# Altium PCB S905D_MIC_V1.0.PcbDoc
Units mil, origin at the board's own origin, x right, y up, seen from the top; angles counter-clockwise.
Board outline 2558.83 x 2558.83 mil, 2 copper layers (Top Layer, Bottom Layer); 57 components, 61 nets, 477 pads, 459 vias.
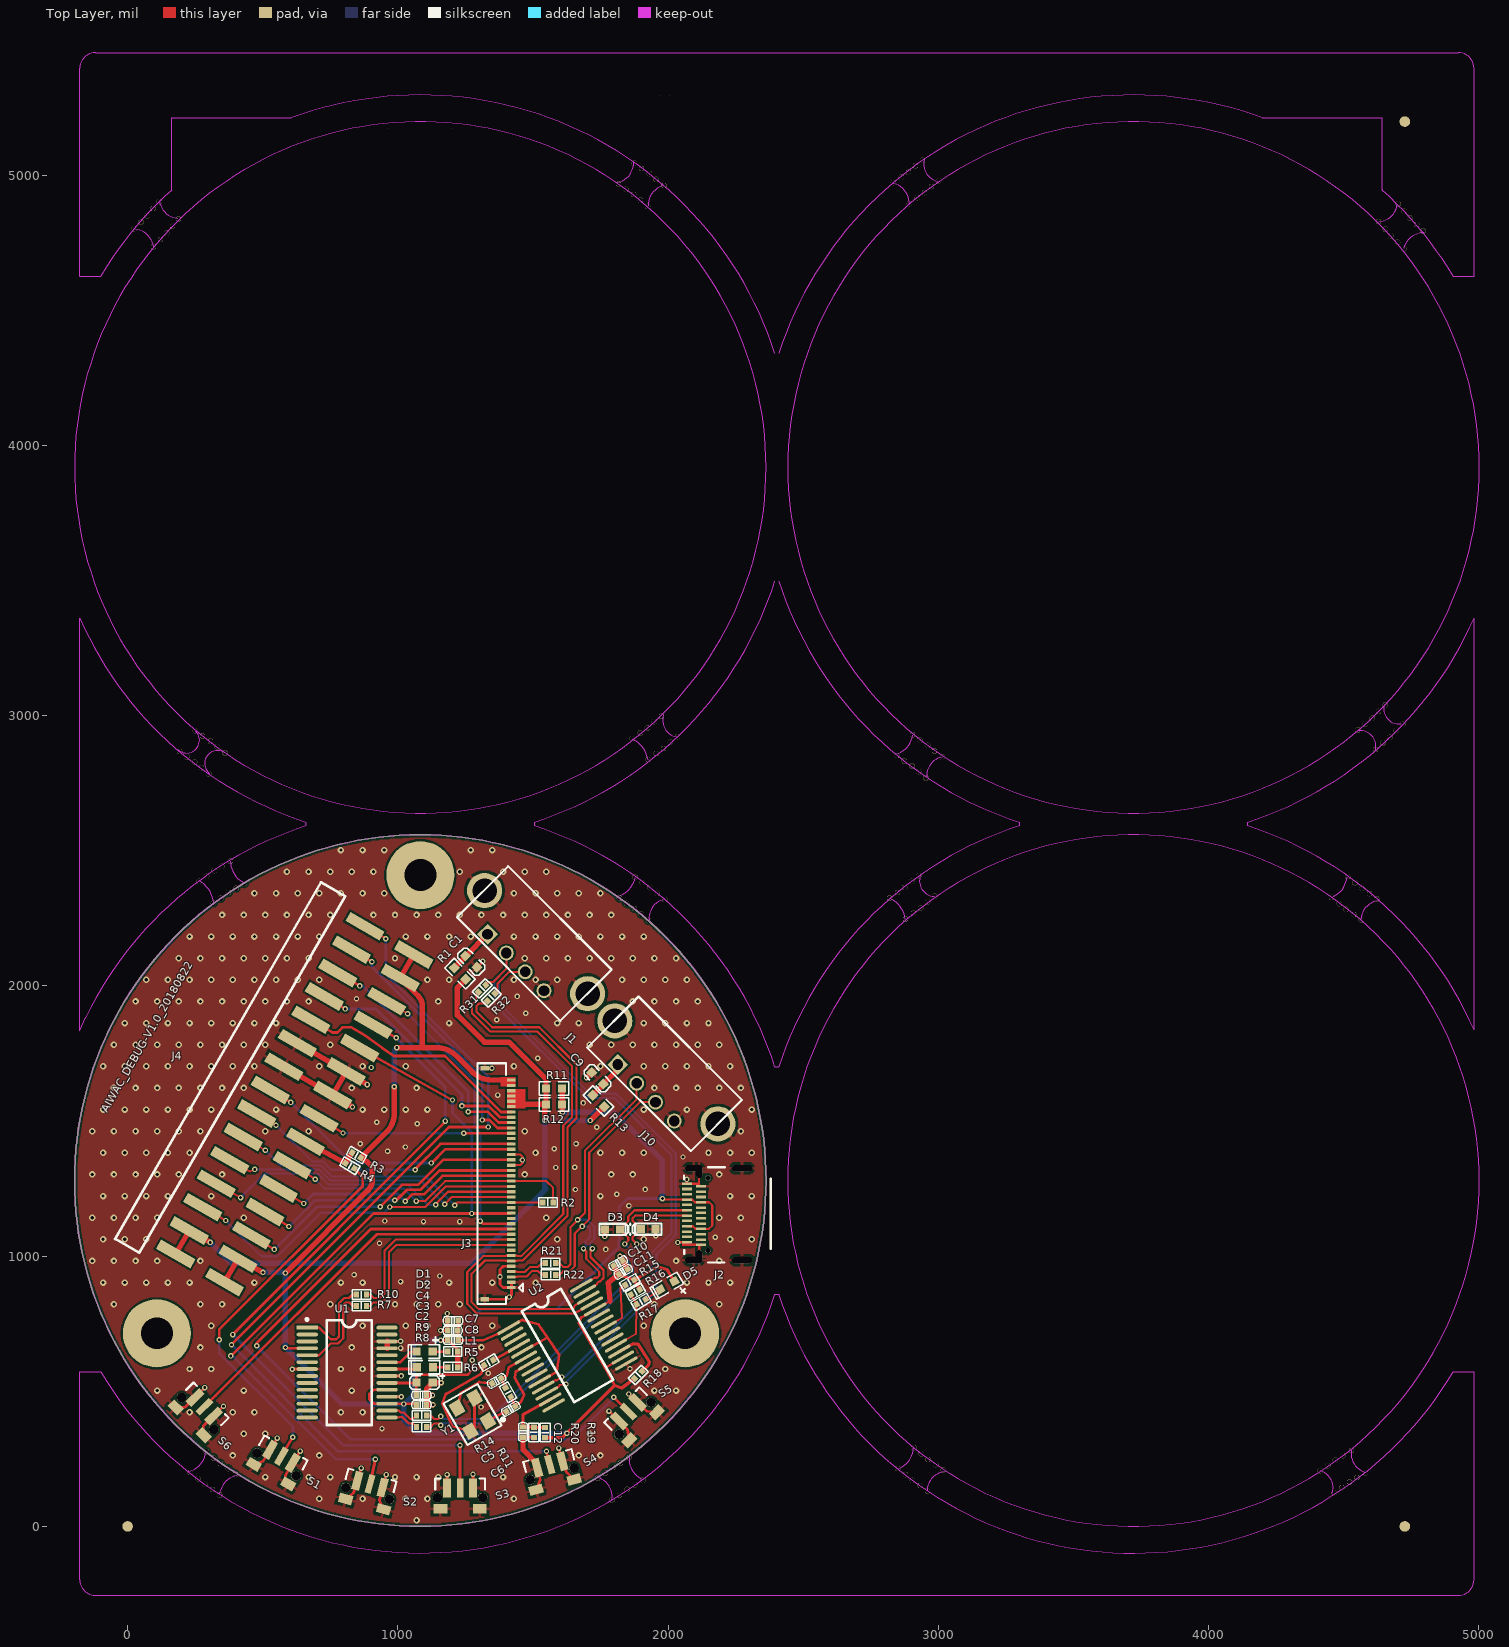
[diagram p0: Top Layer view]
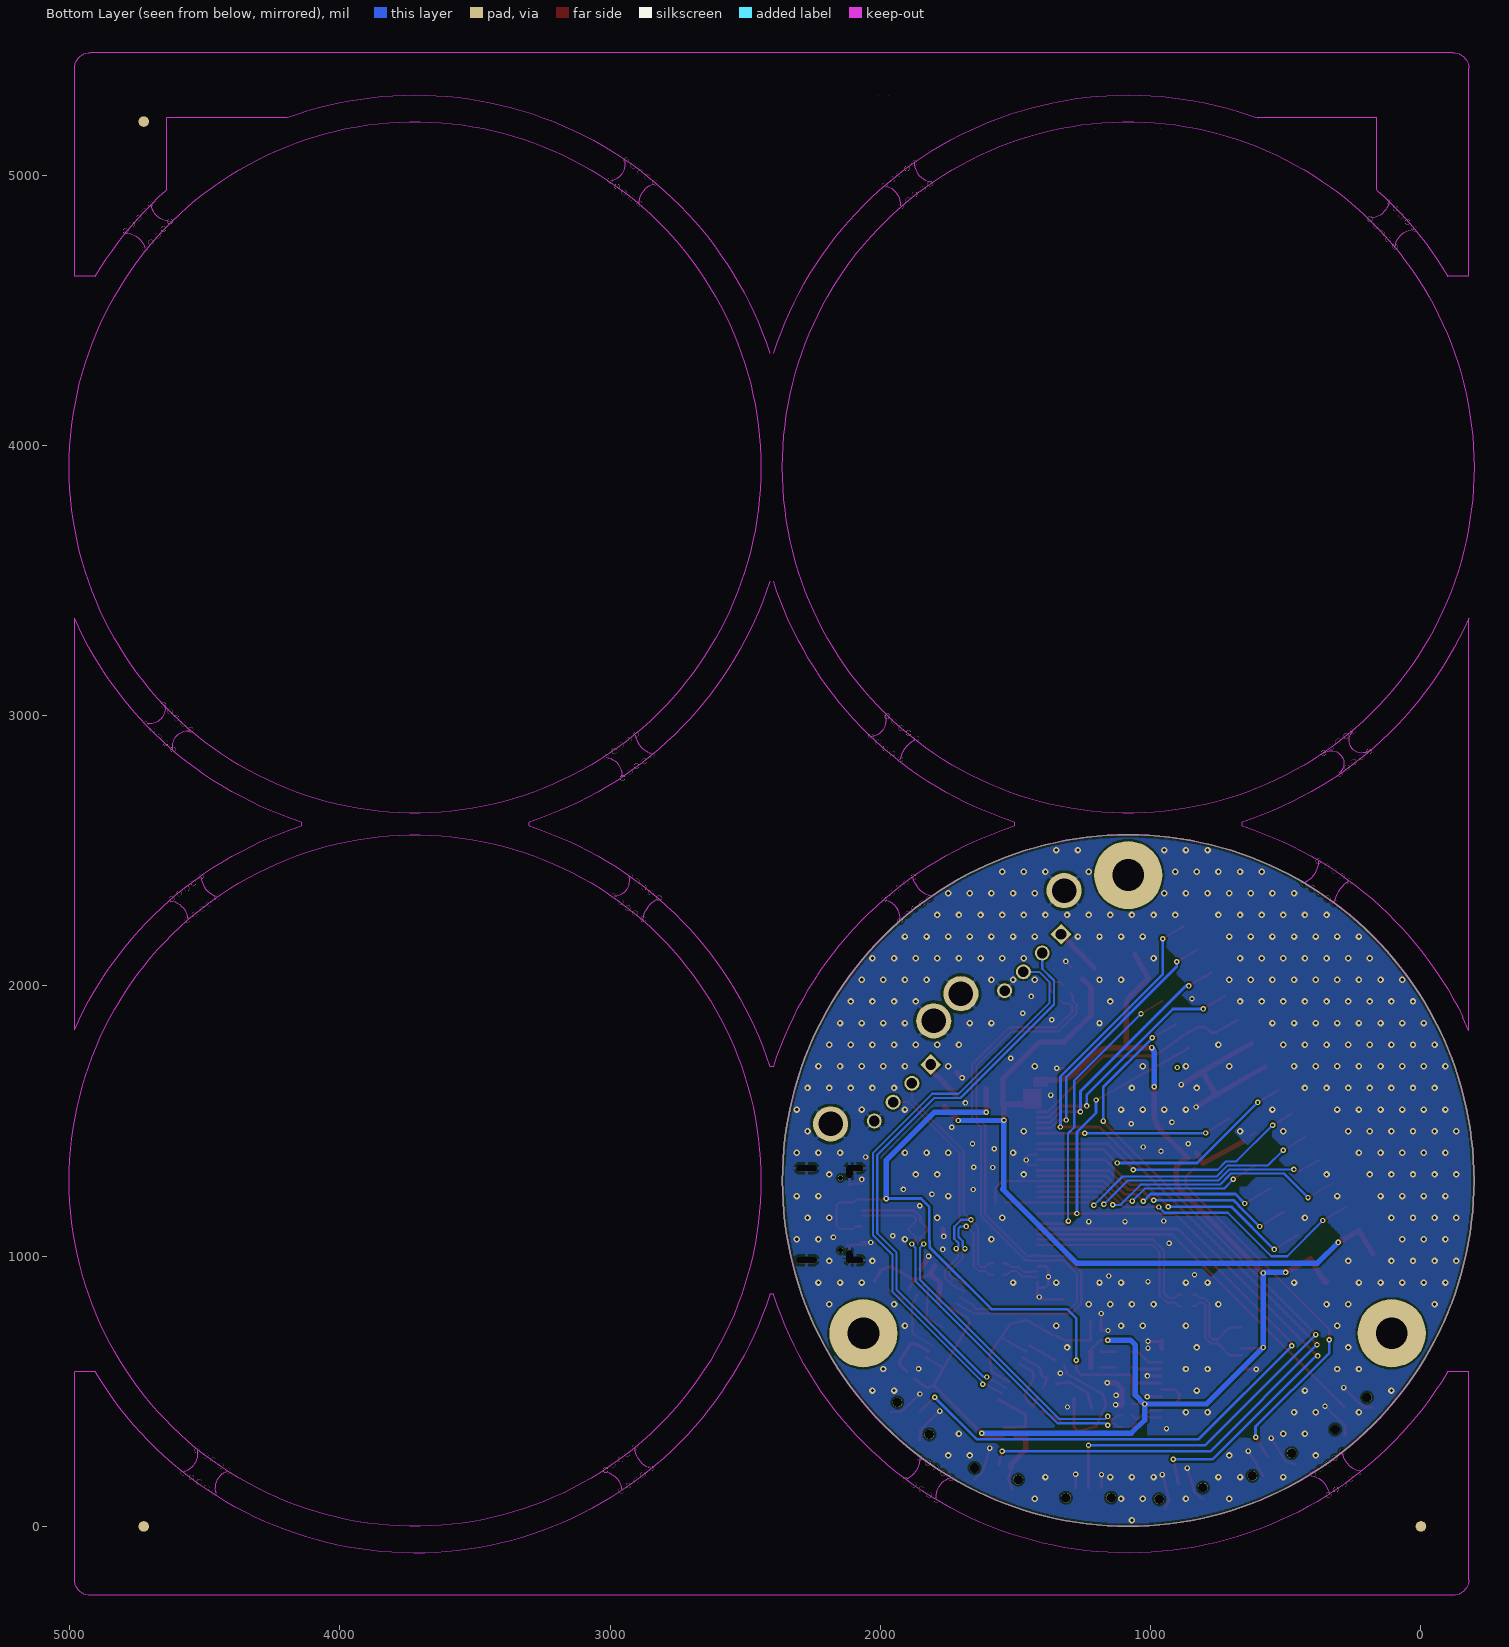
[diagram p1: Bottom Layer view, seen from below]

## Layer stack, top to bottom
Top Solder: solder mask 0.4, Solder Resist, Dk 3.5
Top Layer: signal copper 1.4
Dielectric 1: dielectric 12.6, FR-4, Dk 4.8
Bottom Layer: signal copper 1.4
Bottom Solder: solder mask 0.4, Solder Resist, Dk 3.5

## Board outline
-196.26,1279.66 ccw(c1083.16,1279.66) 1083.16,0.25 ccw(c1083.16,1279.66) 2362.57,1279.66 ccw(c1083.16,1279.66) 1083.16,2559.08 ccw(c1083.16,1279.66)

## Design rules (kind name [scope] priority, off if disabled: settings)
Clearance Clearance_1 [All] p1: gap=7
Clearance [All] p2: gap=7
DiffPairsRouting DiffPair_DiffPairsRouting_2 [InDifferentialPair ('NewDifferentialPair2')] p1: maxlimit=8 minlimit=8 mostfreqgap=8 toplayer_minwidth=8 toplayer_maxwidth=8 toplayer_prefwidth=8 bottomlayer_minwidth=8 bottomlayer_maxwidth=8 bottomlayer_prefwidth=8 maxuncoupledlength=500
DiffPairsRouting DiffPairsRouting_1 [All] p2: maxlimit=8 minlimit=8 mostfreqgap=8 toplayer_minwidth=8 toplayer_maxwidth=8 toplayer_prefwidth=8 bottomlayer_minwidth=8 bottomlayer_maxwidth=8 bottomlayer_prefwidth=8 maxuncoupledlength=500
DiffPairsRouting DiffPair_DiffPairsRouting_1 [InDifferentialPair ('NewDifferentialPair3')] p3: maxlimit=8 minlimit=8 mostfreqgap=8 toplayer_minwidth=8 toplayer_maxwidth=8 toplayer_prefwidth=8 bottomlayer_minwidth=8 bottomlayer_maxwidth=8 bottomlayer_prefwidth=8 maxuncoupledlength=500
DiffPairsRouting DiffPair_DiffPairsRouting [InDifferentialPair ('NewDifferentialPair4')] p4: maxlimit=8 minlimit=8 mostfreqgap=8 toplayer_minwidth=8 toplayer_maxwidth=8 toplayer_prefwidth=8 bottomlayer_minwidth=8 bottomlayer_maxwidth=8 bottomlayer_prefwidth=8 maxuncoupledlength=500
DiffPairsRouting [All] p5: maxlimit=10 minlimit=8 mostfreqgap=8 toplayer_minwidth=8 toplayer_maxwidth=8 toplayer_prefwidth=8 bottomlayer_minwidth=8 bottomlayer_maxwidth=8 bottomlayer_prefwidth=8 maxuncoupledlength=500
DiffPairsRouting DiffPair_DiffPairsRouting_3 [InDifferentialPair ('NewDifferentialPair1')] p6: maxlimit=8 minlimit=8 mostfreqgap=8 toplayer_minwidth=8 toplayer_maxwidth=8 toplayer_prefwidth=8 bottomlayer_minwidth=8 bottomlayer_maxwidth=8 bottomlayer_prefwidth=8 maxuncoupledlength=500
MatchedLengths DiffPair_MatchedLengths [InDifferentialPair ('NewDifferentialPair4')] p1: tolerance=1000 checknetsindiffpair=FALSE checkdiffpairvsdiffpair=TRUE checkxsignals=TRUE checkothers=TRUE
MatchedLengths DiffPair_MatchedLengths_1 [InDifferentialPair ('NewDifferentialPair3')] p2: tolerance=1000 checknetsindiffpair=FALSE checkdiffpairvsdiffpair=TRUE checkxsignals=TRUE checkothers=TRUE
MatchedLengths DiffPair_MatchedLengths_2 [InDifferentialPair ('NewDifferentialPair2')] p3: tolerance=1000 checknetsindiffpair=FALSE checkdiffpairvsdiffpair=TRUE checkxsignals=TRUE checkothers=TRUE
MatchedLengths DiffPair_MatchedLengths_3 [InDifferentialPair ('NewDifferentialPair1')] p4: tolerance=1000 checknetsindiffpair=FALSE checkdiffpairvsdiffpair=TRUE checkxsignals=TRUE checkothers=TRUE
PolygonConnect PolygonConnect_2 [isvia] p1: connectstyle=Direct reliefconductorwidth=10 reliefentries=4 polygonreliefangle="90 Angle" airgapwidth=10
PolygonConnect [All] p2: connectstyle=Relief reliefconductorwidth=10 reliefentries=4 polygonreliefangle="90 Angle" airgapwidth=10
RoomDefinition Sheet1 [InComponentClass('Sheet1')] p1: confinementstyle=ConfineIn formatcopy=TRUE lockcomponents=FALSE outline -6050.53,-3977.53 -4050.53,-3977.53 -4050.53,-2977.53 -6050.53,-2977.53
RoutingVias [All] p1: holewidth=10 width=20 viastyle="Through Hole" minholewidth=10 minwidth=20 maxholewidth=10 maxwidth=20
SilkToSilkClearance [All] p1: silktosilkclearance=0
SilkToSolderMaskClearance [IsPad] p1: minsilkscreentomaskgap=0 clearancetoexposedcopper=TRUE
SolderMaskExpansion [All] p1: expansion=4
Width [All] p1: maxlimit=20 minlimit=8 preferedwidth=10 minimp=50.000000 maximp=50.000000 favimp=50.000000
27 further rules are at their usual default settings.

## Components (designator, comment, footprint, x,y, rotation, side; value= is the part's Value field where it differs from the comment)
C1 "106K50V" C0603 1250,2111 r315 top
C2 "101J10V" C0402 1087.04,449.83 r0 top
C3 "101J10V" C0402 1087.04,485.83 r0 top
C4 "106K50V" C0603 1069.04,531.83 r0 top
C5 "22PF" C0402 1365.55,538.5 r30 top
C6 "22PF" C0402 1418,435 r30 top
C7 "0.1UF" C0402 1204,761 r180 top
C8 "0.1UF" C0402 1203,725 r180 top
C9 "106K50V" C0603 1760,1637 r135 top
C10 "0.1UF" C0402 1815,974 r210 top
C11 "0.1UF" C0402 1834,942 r210 top
C12 "0.1UF" C0402 1463,349 r270 top
D1 "LED0603G" D-LED0603G 1129.04,646.83 r180 top
D2 "LED0603G" D-LED0603G 1130.04,588.83 r180 top
D3 "ESDA_TR1/0603" HS_0603D 1794.5,1099 r180 top
D4 "ESDA_TR1/0603" HS_0603D 1926.5,1100 r0 top
D5 "LED0603G" D-LED0603G 2022.96,907 r210 top
J1 "USB" USB-A 1331.81,2191.19 r315 top
J2 "TYPEC-3KU024S" "MICRO -TYPE C" 2069.86,1046.93 r90 top locked
J3 "FH34SRJ-40S" FH34SRJ-40S 1371.04,1267.83 r90 top locked
J4 "CN15*2 贴片" "CN15*2 贴片" 878.04,2220.65 r240 top locked
J10 "USB" USB-A 1814,1709 r315 top
L1 "120R/0402" C0402 1204,689 r0 top
R1 "0R" R0603 1208.43,2066.57 r315 top
R2 "22R" R0402 1555.54,1198.83 r0 top
R3 "10K" R0402 847.04,1373.83 r330 top
R4 "22R  NC" R0402 822.58,1334.33 r150 top
R5 "330R" R0402 1203.04,646.83 r0 top
R6 "330R" R0402 1203.04,588.83 r0 top
R7 "22R" R0402 865,816 r180 top
R8 "2.2R" R0402 1088.04,367.83 r0 top
R9 "2.2R" R0402 1088.04,410.83 r0 top
R10 "22R" R0402 865,858 r180 top
R11 "0R  NC" R0603 1608.04,1620 r180 top
R11 "1M" R0402 1408,496 r120 top
R12 "0R NC" R0603 1548.04,1561.83 r0 top
R13 "0R" R0603 1721,1595 r315 top
R14 "1M" R0402 1336,606 r210 top
R15 "100K" R0402 1858,903 r210 top
R16 "100K" R0402 1879,867 r210 top
R17 "1K" R0402 1900,831 r210 top
R18 "10K" R0402 1889.44,560.44 r45 top
R19 "10K" R0402 1545,347 r270 top
R20 "47K" R0402 1503,348 r90 top
R21 "0R" R0402 1565,974 r0 top
R22 "0R" R0402 1565,931 r0 top
R31 "0R" R0402 1312,1990.47 r45 top
R32 "0R" R0402 1345.47,1958 r45 top
S1 "KSMD4.5X3-6P" SKRTLAE010 569.04,259.83 r330 top
S2 "KSMD4.5X3-6P" SKRTLAE010 897.02,156.4 r345 top
S3 "KSMD4.5X3-6P" SKRTLAE010 1230.27,141.83 r0 top
S4 "KSMD4.5X3-6P" SKRTLAE010 1562.04,228.83 r15 top
S5 "KSMD4.5X3-6P" SKRTLAE010 1853.04,424.83 r45 top
S6 "KSMD4.5X3-6P" SKRTLAE010 284.04,442.83 r315 top
U1 "FT232R_SOP28" SSOP28#1 664.76,735.73 r0 top locked
U2 "GL850G-HHG31" SSOP28#2 1409.8,735.53 r30 top locked
Y1 "12MHz" Y-CPX-32GA-4P 1332.99,390.16 r120 top

## Footprints (in the part's own frame and the unit in brackets; to place one, negate y for a bottom-side part, rotate by r counter-clockwise, add the part's x,y. Pads: shape width x height; smd on the part's side, far side on the other; paste and mask are expansions set on the pad)
C0402 [mil]
  rect 20x22 smd: 1(-19,0) 2(19,0)
  silkscreen extent -36,-15 36,15
C0603 [mil]
  rect 30x30 smd: 1(0,0) 2(60,0)
  silkscreen extent -25,-25 85,25, body extent -1,-15 61,16, height 12
"CN15*2 贴片" [mm]
  rect 1x3.7 smd: 01(35.56,5.3) 02(35.56,0) 03(33.02,5.3) 04(33.02,0) 05(30.48,5.3) 06(30.48,0) 07(27.94,5.3) 08(27.94,0) 09(25.4,5.3) 10(25.4,0) 11(22.86,5.3) 12(22.86,0) 13(20.32,5.3) 14(20.32,0) 15(17.78,5.3) 16(17.78,0) 17(15.24,5.3) 18(15.24,0) 19(12.7,5.3) 20(12.7,0) 21(10.16,5.3) 22(10.16,0) 23(7.62,5.3) 24(7.62,0) 25(5.08,5.3) 26(5.08,0) 27(2.54,5.3) 28(2.54,0) 29(0,5.3) 30(0,0)
  silkscreen extent -1.52,-5.64 37.19,-3.02
D-LED0603G [mil]
  rect 30x30 smd: 1(0,0) 2(60,0)
  silkscreen extent -25,-25 90,25, body extent -2,-16 62,15, height 24
FH34SRJ-40S [mm]
  rect 0.3x0.8 smd: 1(-9.75,-1.25) 2(-9.25,-1.25) 3(-8.75,-1.25) 4(-8.25,-1.25) 5(-7.75,-1.25) 6(-7.25,-1.25) 7(-6.75,-1.25) 8(-6.25,-1.25) 9(-5.75,-1.25) 10(-5.25,-1.25) 11(-4.75,-1.25) 12(-4.25,-1.25) 13(-3.75,-1.25) 14(-3.25,-1.25) 15(-2.75,-1.25) 16(-2.25,-1.25) 17(-1.75,-1.25) 18(-1.25,-1.25) 19(-0.75,-1.25) 20(-0.25,-1.25) 21(0.25,-1.25) 22(0.75,-1.25) 23(1.25,-1.25) 24(1.75,-1.25) 25(2.25,-1.25) 26(2.75,-1.25) 27(3.25,-1.25) 28(3.75,-1.25) 29(4.25,-1.25) 30(4.75,-1.25) 31(5.25,-1.25) 32(5.75,-1.25) 33(6.25,-1.25) 34(6.75,-1.25) 35(7.25,-1.25) 36(7.75,-1.25) 37(8.25,-1.25) 38(8.75,-1.25) 39(9.25,-1.25) 40(9.75,-1.25)
  rect 0.4x0.8 smd: 41(10.85,1.25) 42(-10.85,1.25)
  silkscreen extent -11.3,-2.34 11.33,1.95
HS_0603D [mil]
  rect 30x30 smd: 1(-27.5,0) 2(27.5,0)
  silkscreen extent -70,-21 49,23
"MICRO -TYPE C" [mm]
  oval 0.6x1.6 hole 0.6 slot 1.6 at 90 deg: 25(-1.57,-0.625) 27(7.07,-0.625)
  oval 1.2x0.6 hole 0.6 slot 1.2 at 0 deg: 26(-1.245,-1.143) 28(6.756,-1.143)
  oval 0.6x1.9 hole 0.6 slot 1.9 at 90 deg: 29(-1.57,-5.175) 30(7.07,-5.175)
  round 0.5 hole 0.5: 31(-0.65,-1.975) 32(6.15,-1.975)
  rect 0.24x0.95 smd: A1(0.12,0) A2(0.62,0) A3(1.12,0) A4(1.62,0) A5(2.12,0) A6(2.62,0) A7(3.12,0) A8(3.62,0) A9(4.12,0) A10(4.62,0) A11(5.12,0) A12(5.62,0) B1(-0.13,-1.3) B2(0.37,-1.3) B3(0.87,-1.3) B4(1.37,-1.3) B5(1.87,-1.3) B6(2.37,-1.3) B7(2.87,-1.3) B8(3.37,-1.3) B9(3.87,-1.3) B10(4.37,-1.3) B11(4.87,-1.3) B12(5.37,-1.3)
  silkscreen extent -1.8,-7.87 7.16,0.28
R0402 [mil]
  rect 20x22 smd: 1(-19,0) 2(19,0)
  silkscreen extent -34,-18 34,18
R0603 [mil]
  rect 30x30 smd: 1(0,0) 2(60,0)
  silkscreen extent -25,-25 85,25, body extent 0,-16 62,15, height 18
SKRTLAE010 [mm]
  rect 0.75x1.8 smd: 1(-1.225,0) 3(1.225,0)
  rect 0.6x1.8 smd: 2(0,0)
  rect 1.3x0.9 smd: 4(-1.85,-1.95) 5(1.85,-1.95)
  round 0.9 hole 0.9: 6(-2.125,-0.9) 6(2.125,-0.9)
  silkscreen extent -2.34,-0.11 2.34,0.89
SSOP28#1 [mm]
  rect 2x0.35 smd: 1(0,0)
  oval 2x0.35 smd: 2(0,-0.65) 3(0,-1.3) 4(0,-1.95) 5(0,-2.6) 6(0,-3.25) 7(0,-3.9) 8(0,-4.55) 9(0,-5.2) 10(0,-5.85) 11(0,-6.5) 12(0,-7.15) 13(0,-7.8) 14(0,-8.45) 15(7.5,-8.45) 16(7.5,-7.8) 17(7.5,-7.15) 18(7.5,-6.5) 19(7.5,-5.85) 20(7.5,-5.2) 21(7.5,-4.55) 22(7.5,-3.9) 23(7.5,-3.25) 24(7.5,-2.6) 25(7.5,-1.95) 26(7.5,-1.3) 27(7.5,-0.65) 28(7.5,0)
  silkscreen extent -0.13,-9.15 6.07,0.87
SSOP28#2 [mm]
  rect 2.388x0.305 smd: 1(0,0)
  oval 2.388x0.305 smd: 2(0,-0.65) 3(0,-1.3) 4(0,-1.951) 5(0,-2.601) 6(0,-3.251) 7(0,-3.901) 8(0,-4.552) 9(0,-5.202) 10(0,-5.852) 11(0,-6.502) 12(0,-7.153) 13(0,-7.803) 14(0,-8.453) 15(7.899,-8.453) 16(7.899,-7.803) 17(7.899,-7.153) 18(7.899,-6.502) 19(7.899,-5.852) 20(7.899,-5.202) 21(7.899,-4.552) 22(7.899,-3.901) 23(7.899,-3.251) 24(7.899,-2.601) 25(7.899,-1.951) 26(7.899,-1.3) 27(7.899,-0.65) 28(7.899,0)
  silkscreen extent 1.83,-9.15 6.07,0.7
USB-A [mm]
  rect 1.397x1.397 hole 1: 1(0,0)
  round 1.397 hole 1: 2(2.5,0) 3(5,0) 4(7.5,0)
  round 3.3 hole 2.3: 5(-3.1,2.7) 6(10.6,2.7)
  silkscreen extent -3.15,-0.91 10.6,5.89
Y-CPX-32GA-4P [mm]
  rect 1.3x1.1 smd: 1(0,0) 2(2.5,0) 3(2.5,1.9) 4(0,1.9)
  silkscreen extent -1,-1.44 3.5,2.8

## Part data
C1 C4 C9: library part C0603X7R-106K50V, "贴片电容-陶瓷"
C2 C3 C5 C6 C7 C8 C10 C11 C12: library part C0402X7R-101J10V, "贴片电容-陶瓷"
D1 D2 D5: library part DLED-0603-G, "贴片二极管-LED"
D3 D4: library part "D Zener", "Zener Diode"
J2: "DIP Switch"
J3: library part SFH34SRJ-40S, "贴片FPC40PIN插座"
L1: library part 3.3uH, "贴片电感-屏蔽"
R1 R11 R12 R13: library part R0603-0R, "贴片电阻-通用"
R2 R3 R4 R5 R6 R7 R8 R9 R10 R11 R14 R15 R16 R17 R18 R19 R20 R21 R22 R31 R32: library part R0402-1KF, "贴片电阻-通用"
S1 S2 S3 S4 S5 S6: "贴片侧按键"
U1: "USB 转串口芯片"
Y1: library part YC-26MHz, "晶振-贴片无源"

## Free pads (board coordinates)
  round 110.51 on Keep-Out: 1(0,-177)
  round 110.5 on Keep-Out: 1(0,5375.1) 1(4726.09,-177) 1(4726.09,5375.1)
  round 251.97 hole 118.11: 2(1083.13,2409.64) 3(108.13,714.64) 4(2063.13,714.64)
  round 19.68 hole 19.68 unplated: 5(24.52,4801.5) 5(49.79,4826.39) 5(72.89,4849.46) 5(94.35,4876.7) 5(96,4735.01) 5(116.62,4901.85) 5(121.44,4761.9) 5(144.54,4784.97) 5(166,4812.21) 5(188.27,4837.36) 5(192.47,2867.47) 5(219.47,2847.47) 5(231.47,199.47) 5(248.47,2828.48) 5(250.47,2944.47) 5(260.47,176.47) 5(264.7,2386.96) 5(273.47,2807.48) 5(277.47,2924.47) 5(285.47,155.47) 5(291.47,276.47) 5(292.73,2405.49) 5(300.47,2784.47) 5(306.47,2905.48) 5(314.47,136.48) 5(317.22,2306.12) 5(318.47,253.47) 5(320.5,2426.24) 5(331.47,2884.48) 5(341.47,116.47) 5(343.47,232.47) 5(345.25,2324.65) 5(348.79,2442.55) 5(360.47,2861.48) 5(372.47,213.48) 5(373.02,2345.4) 5(380.32,2461.94) 5(399.47,193.47) 5(401.31,2361.71) 5(432.15,2379.22) 5(1739.7,178.96) 5(1767.73,197.49) 5(1792.22,98.12) 5(1795.5,218.24) 5(1816.47,4967.47) 5(1819.47,2325.47) 5(1820.25,116.65) 5(1823.79,234.55) 5(1843.47,4947.47) 5(1846.47,2305.47) 5(1848.02,137.4) 5(1855.32,253.94) 5(1867.29,2915.5) 5(1872.47,4928.47) 5(1874.47,5044.47) 5(1875.47,2286.47) 5(1876.31,153.71) 5(1877.47,2402.47) 5(1896.49,2935.63) 5(1897.47,4907.47) 5(1900.47,2265.47) 5(1901.47,5024.47) 5(1904.47,2382.47) 5(1907.15,171.22) 5(1923.25,2954.34) 5(1924.47,4884.47) 5(1926.14,2837.62) 5(1927.47,2242.47) 5(1930.47,5005.47) 5(1933.47,2363.47) 5(1949.11,2977.44) 5(1955.47,4984.47) 5(1955.86,2859.68) 5(1958.47,2342.47) 5(1975.41,2998.34) 5(1982.61,2878.39) 5(1984.47,4961.47) 5(1987.47,2319.47) 5(2008.47,2901.49) 5(2034.78,2922.39) 5(2819.37,2325.22) 5(2833.37,4972.22) 5(2846.47,2852.47) 5(2848.58,2345.35) 5(2849.47,214.47) 5(2862.58,4992.35) 5(2873.47,2832.47) 5(2875.33,2364.06) 5(2878.22,2247.34) 5(2878.47,191.47) 5(2889.33,5011.06) 5(2892.22,4894.34) 5(2901.19,2387.16) 5(2902.47,2813.48) 5(2903.47,170.47) 5(2904.47,2929.47) 5(2907.94,2269.4) 5(2909.47,291.48) 5(2915.19,5034.16) 5(2921.94,4916.4) 5(2927.47,2792.48) 5(2927.5,2408.06) 5(2931.47,2909.47) 5(2932.47,151.48) 5(2934.7,2288.11) 5(2936.47,268.47) 5(2941.5,5055.06) 5(2948.7,4935.11) 5(2954.47,2769.47) 5(2959.47,131.48) 5(2960.47,2890.48) 5(2960.56,2311.2) 5(2961.47,247.47) 5(2974.56,4958.2) 5(2985.47,2869.48) 5(2986.86,2332.11) 5(2990.47,228.48) 5(3000.86,4979.11) 5(3014.47,2846.48) 5(3017.47,208.47) 5(4412.7,205.96) 5(4440.73,224.49) 5(4454.47,2327.47) 5(4465.22,125.12) 5(4468.5,245.24) 5(4483.47,2304.47) 5(4493.25,143.65) 5(4496.79,261.55) 5(4508.47,2283.47) 5(4514.47,2404.47) 5(4521.02,164.4) 5(4528.32,280.94) 5(4537.47,2264.48) 5(4541.47,2381.47) 5(4549.31,180.72) 5(4552.33,2947.02) 5(4564.47,2244.47) 5(4566.47,2360.47) 5(4579.67,2969.61) 5(4580.15,198.22) 5(4595.47,2341.48) 5(4604.69,2990.59) 5(4617.75,2874.56) 5(4622.47,2321.47) 5(4628.44,3015.85) 5(4628.55,4828.2) 5(4645.43,2899.12) 5(4652.83,3038.96) 5(4653.12,4800.52) 5(4670.45,2920.1) 5(4674.09,4775.49) 5(4694.2,2945.36) 5(4699.35,4751.75) 5(4701.01,4893.61) 5(4718.59,2968.47) 5(4722.47,4727.36) 5(4723.61,4866.27) 5(4744.58,4841.25) 5(4769.84,4817.5) 5(4792.96,4793.12)
  round 39.37 smd: 6(0,0) 6(4726.09,0) 6(4726.09,5198.1)
  round 39.37 smd far side: 6(0,0) 6(4726.09,0) 6(4726.09,5198.1)

## Via types
v1: diameter 24, hole 12, Top Layer to Bottom Layer, tented both sides, 319 vias
v2: diameter 20, hole 10, Top Layer to Bottom Layer, tented both sides, 139 vias
v3: diameter 20, hole 10, Top Layer to Bottom Layer, 1 vias

## Nets (pads, with @x,y where several pads share a name; then routed paths per layer and width w, separated by ;. In a path a pad name is that pad's centre, name@x,y a point inside that pad or via, vN(x,y) a via of type N, cw(c..) or ccw(c..) an arc to the next point about the centre after c; other vN are vias at no path point)
3V3: C2.1 C10.2 C11.2 D5.1 J3.39 J3.40 J4.27 J4.29 L1.1 R3.2 R5.2 R6.2 R15.1 R16.1 R18.1 R19.2 U1.4 U1.17 U1.19 U2.16 U2.24 | length 5889
  Top Layer w8: U2.24 1785,833.69
  Top Layer w10: v2(584.04,661.96) 587.04,658.96 U1.4 ; U1.19 910.42,505.42 895.45,490.45 895.45,469.83 911.04,454.24 U1.17 1067.63,454.24 C2.1@1068.04,453.83 ; v2(1159,689) L1.1 1222.04,651.96 R5.2 ; J3.39 J3.40 ; U2.24 1678,773 1669,753 1766.55,586.32 ; 1802.52,521.83 1772,577 1766.55,586.32 ; U2.16 1766.55,586.32
  Top Layer w12: R19.2 1608.69,328 v2(1625.69,345) 1802.52,521.83 1828.35,511.83 R18.1 ; C11.2 R15.1 ; R16.1 R15.1 ; D5.1 1996,950 1962,961 R15.1
  Top Layer w20: 358.74,903.88 349.82,903.88 370.94,925 408.74,990.49 v2(501.04,939.83) ; v2(584.04,937.83) 890.15,1243.94 ccw(c854.21,1279.88) 905.04,1279.88 905.04,1322.83 ccw(c885.72,1322.83) 899.38,1336.49 886.04,1349.83 R3.2 957.75,1458.59 ccw(c887.04,1529.3) 987.04,1529.3 v2(987.04,1626.83) ; v2(996.04,1771.83) 1090,1771.83 ; J4.29 J4.27 1075.53,1962.93 cw(c1040.6,1928) 1090,1928 1090,1771.83 ; R6.2 R5.2 ; J3.40 1346.6,1651.69 cw(c1346.6,1751.69) 1275.89,1680.98 1214.33,1742.54 ccw(c1143.62,1671.83) 1143.62,1771.83 1090,1771.83 ; 1785,833.69 1779,902 C11.2 C10.2
  Bottom Layer w20: v2(501.04,939.83) 582.04,939.83 v2(584.04,937.83) v2(584.04,661.96) 793.17,452.83 v2(1022,452.83) ; v2(987.04,1626.83) 987.04,1750.1 cw(c1017.77,1750.1) v2(996.04,1771.83) ; v2(1159,689) 1075,689 1057,671 1057,485.61 1024.22,452.83 v2(1022,452.83) ; v2(1625.69,345) 1072,345 1022,393 v2(1022,452.83)
5V: J3.35 J3.36 J3.37 J3.38 R1.2 R11.2@1548.04,1620 R12.1 R13.2 | length 2940.4
  Top Layer w20: 178.04,1008.21 228.04,1094.82 v2(306.04,1050.83) ; R1.2 1220,1993.3 1220,1892 1320,1792 1411,1792 1548.04,1654.96 R12.1 ; J3.36 J3.37 ; 1428.48,1564.72 1431.37,1561.83 R12.1 ; v2(1543,1502.47) 1543,1556.79 R12.1 ; v2(1712,1502) R13.2@1762.57,1552.57
  Bottom Layer w20: v2(306.04,1050.83) 383.04,973.83 1273.83,973.83 1548.04,1248.04 1543,1253.08 v2(1543,1502.47) 1543.47,1502 v2(1712,1502)
CBUS0: D1.2 U1.23 | length 125.2
  Top Layer w10: U1.23 1008.99,607.78 1048.04,646.83 D1.2
CBUS1: D2.2 U1.22 | length 112.7
  Top Layer w10: U1.22 1063.4,582.19 D2.2
DM1: J10.2 R21.2 U2.27 | length 1218.5
  Top Layer w8: R21.2 1598,974 1611.5,960.5 1629.5,960.5 1638.75,969.75 1638.75,1106.75 1692,1160 1692,1389.52 1883.6,1581.12 J10.2 ; U2.27 1736,895 1738.6,902.8 1748.81,907.19 1761,919.37 1761,948.63 1712.81,996.81 1712.81,1020.81 v2(1720,1028)
  Bottom Layer w8: v2(1665,1135) 1701.37,1135 1727,1109.37 1727,1064.37 1711.5,1048.87 1711.5,1036.5 v2(1720,1028)
DM4: J1.2 R31.2 U2.11 | length 2332.3
  Top Layer w8: R31.2 1335.33,2013.81 1351.9,2013.81 1401.4,2063.31 J1.2 ; U2.11@1534.27,511.83 U2.11 1583.47,541 1588.01,541 1606,553 v2(1607,553)
  Bottom Layer w8: J1.2 1401.4,2063.31 1357.86,2019.77 1357.86,1931.14 1704,1585 1801.47,1585 2012,1374.47 2012,1085 1940,1013 1940,874.63 1618.37,553 v2(1607,553)
DP1: J10.3 R22.2 U2.28 | length 1170.6
  Top Layer w8: R22.2 1598,931 1611.5,944.5 1636.13,944.5 1654.75,963.12 1654.75,1083.75 1708,1137 1708,1382.89 1894.91,1569.81 J10.3 ; U2.28@1674.91,891.03 U2.28 1728,920 1737,920 1745,928 1745,942 1696.81,990.19 1696.81,1018.19 v2(1687,1028)
  Bottom Layer w8: v2(1682,1110) 1703.75,1110 1711,1102.75 1711,1071 1695.5,1055.5 1695.5,1036.5 v2(1687,1028)
DP4: J1.3 R32.2 U2.12 | length 2339.1
  Top Layer w8: R32.2 1368.81,1981.33 1368.81,2008.09 1412.72,2052 J1.3 ; U2.12 1594.57,517.02 1599.9,523.43 v2(1622,526)
  Bottom Layer w8: J1.3 1412.72,2052 1373.86,2013.14 1373.86,1937.77 1710.63,1601 1808.1,1601 2028,1381.1 2028,1078.37 1956,1006.37 1956,868 1622,534 v2(1622,526)
DSP_RST: J3.20 | length 1317.2
  Top Layer w8: 278.04,1181.42 v2(363.04,1131.83) ; v2(970.04,1181.83) 1101.04,1181.83 1177.2,1257.99 J3.20
  Bottom Layer w8: v2(363.04,1131.83) 495.04,999.83 554.04,999.83 715.04,1160.83 949.04,1160.83 v2(970.04,1181.83)
DSP_SCL_B: J3.18 J4.10 | length 1119.4
  Top Layer w8: J4.10 453.04,1312.83 v2(470.04,1320.83) ; v2(1173.04,1191.83) 1199.83,1218.62 J3.18
  Bottom Layer w8: v2(470.04,1320.83) 708.95,1320.83 749.96,1279.81 1085.05,1279.81 v2(1173.04,1191.83)
DSP_SDA_B: J3.19 | length 1213.7
  Top Layer w8: 328.04,1268.02 v2(418.04,1216.83) ; v2(1140.04,1189.83) 1138.54,1191.33 1185.51,1238.3 J3.19
  Bottom Layer w8: v2(418.04,1216.83) 507.04,1305.83 702.74,1305.83 743.75,1264.81 1036.75,1264.81 1111.74,1189.83 v2(1140.04,1189.83)
GND: C1.2 C2.2 C3.2 C4.2 C7.2 C8.2 C9.2 C10.1 C11.1 C12.2 D3.2 D4.2 J1.4 J1.5 J1.6 J2.25 J2.26 J2.27 J2.28 J2.29 J2.30 J2.A1 J2.A12 J2.B1 J2.B12 J3.1 J3.2 J3.5 J3.24 J3.26 J3.41 J3.42 J4.17 J4.18 J4.19 J4.20 J10.4 J10.5 J10.6 R14.2 R20.1 S1.1 S1.3 S1.4 S1.5 S2.1 S2.3 S2.4 S2.5 S3.1 S3.3 S3.4 S3.5 S4.1 S4.3 S4.4 S4.5 S5.1 S5.3 S5.4 S5.5 S6.1 S6.3 S6.4 S6.5 U1.7 U1.18 U1.21 U1.25 U1.26 U2.15 Y1.2 Y1.4 | length 4094.2
  Top Layer w8: J3.24 1452.94,1336.73 1461.04,1344.83 v2(1461.04,1355.83) 1461.04,1367.83 1452.77,1376.1 J3.26 ; v2(2036,1050.47) 2037.18,1051.66 J2.A1 2070.34,1051.66 2080.19,1041.81 J2.B1 ; v2(2069.47,1284) 2069.77,1273.19 J2.A12@2069.86,1268.47 ; J2.A12 2106.47,1268.19 2114.86,1259.8 J2.28
  Top Layer w10: S6.4 212.04,440.83 S6.1 v2(286.04,513.83) ; S6.5 280.04,370.83 S6.3 v2(355.04,444.83) ; S1.4 501.04,240.83 S1.1 544.56,311.64 v2(554.04,326.83) ; 584.04,186.83 S1.3 v2(639.04,278.83) ; v2(609.04,581.83) 609.4,582.19 U1.7 ; S2.4 836.04,123.83 S2.1 v2(865.04,215.83) ; S2.5 932.04,97.83 S2.3 v2(957.04,191.83) ; U1.18 v2(1013.04,479.83) ; U1.21 1011.81,556.6 v2(1012.04,556.83) ; U1.26 1009.76,684.55 v2(1010.04,684.83) ; v2(1158,725) C8.2 1184,760 C7.2 1183,763 v2(1183,788) ; S3.1 v2(1182.04,191.83) ; v2(1278.04,192.83) S3.3 ; Y1.2 1283.78,368.33 Y1.4 1201,370 1165,455 1177.58,489.79 1309,565 R14.2 ; C1.2 v2(1314.43,2090.57) ; J3.42 1403.87,840.66 v2(1412.21,849) 1420.25,857.04 J3.1 ; J3.41 1347.87,1694.99 v2(1348.04,1694.83) ; J3.2 J3.1 ; J3.5 1389.92,962.71 1378.04,950.83 v2(1378.04,923.97) 1378.04,894.83 1388.9,883.97 J3.1 ; C12.2 R20.1 ; S4.4 1527.04,172.83 S4.1 ; v2(1595.04,289.83) S4.3 1625.04,198.83 S4.5 ; v2(1781.04,426.83) S5.1 1850.04,358.83 S5.4 ; v2(1854,490) 1855.08,490 1861.77,483.31 1868.96,476.46 1887.25,459.04 S5.3@1890.83,455.62 ; S5.3 1922.04,425.83 S5.5 ; J2.26 2114.86,1035.63 J2.B1
  Top Layer w20: J4.18 J4.17 ; J4.20 J4.19 ; v2(832.04,1551.83) J4.17 ; v2(887.04,1634.83) J4.19 ; U1.25 U1.26 ; v2(1128.04,485.83) C3.2 ; v2(1130.04,449.83) C2.2 C3.2 ; v2(1161.04,531.83) C4.2 1106.04,508.83 C3.2 ; C12.2 1463,284 1515.45,231.55 S4.1 ; v2(1698,1660) 1698.15,1660 C9.2 ; v2(1766,1073) D3.2 ; v2(1822,1000) C10.1 C11.1 ; J4.17 J4.19
  other v1: 1069.47,22.47 709.47,102.47 869.47,102.47 1029.47,102.47 1109.47,102.47 1429.47,102.47 509.47,182.47 669.47,182.47 749.47,182.47 989.47,182.47 1069.47,182.47 1149.47,182.47 1389.47,182.47 389.47,262.47 709.47,262.47 1669.47,262.47 1749.47,262.47 429.47,342.47 509.47,342.47 1709.47,342.47 229.47,422.47 389.47,422.47 469.47,422.47 789.47,422.47 869.47,422.47 109.47,502.47 429.47,502.47 829.47,502.47 1949.47,502.47 2029.47,502.47 229.47,582.47 309.47,582.47 789.47,582.47 869.47,582.47 1989.47,582.47 269.47,662.47 829.47,662.47 1309.47,662.47 309.47,742.47 869.47,742.47 1029.47,742.47 1109.47,742.47 1349.47,742.47 1909.47,742.47 -50.53,822.47 269.47,822.47 349.47,822.47 749.47,822.47 989.47,822.47 1069.47,822.47 1149.47,822.47 1229.47,822.47 1949.47,822.47 2189.47,822.47 -90.53,902.47 -10.53,902.47 69.47,902.47 149.47,902.47 229.47,902.47 469.47,902.47 789.47,902.47 869.47,902.47 1109.47,902.47 1189.47,902.47 1349.47,902.47 1509.47,902.47 2069.47,902.47 2149.47,902.47 2229.47,902.47 -130.53,982.47 -50.53,982.47 29.47,982.47 109.47,982.47 269.47,982.47 2029.47,982.47 2189.47,982.47 -90.53,1062.47 -10.53,1062.47 69.47,1062.47 1589.47,1062.47 1909.47,1062.47 2229.47,1062.47 2309.47,1062.47 -130.53,1142.47 -50.53,1142.47 29.47,1142.47 109.47,1142.47 429.47,1142.47 1549.47,1142.47 1789.47,1142.47 2189.47,1142.47 2269.47,1142.47 -90.53,1222.47 -10.53,1222.47 69.47,1222.47 149.47,1222.47 309.47,1222.47 1749.47,1222.47 2229.47,1222.47 2309.47,1222.47 -130.53,1302.47 -50.53,1302.47 29.47,1302.47 109.47,1302.47 189.47,1302.47 349.47,1302.47 1469.47,1302.47 1789.47,1302.47 1869.47,1302.47 2189.47,1302.47 -90.53,1382.47 -10.53,1382.47 69.47,1382.47 149.47,1382.47 229.47,1382.47 1509.47,1382.47 1749.47,1382.47 1829.47,1382.47 1909.47,1382.47 2149.47,1382.47 2229.47,1382.47 2309.47,1382.47 -130.53,1462.47 -50.53,1462.47 29.47,1462.47 109.47,1462.47 189.47,1462.47 269.47,1462.47 509.47,1462.47 669.47,1462.47 1469.47,1462.47 2269.47,1462.47 -90.53,1542.47 -10.53,1542.47 69.47,1542.47 149.47,1542.47 229.47,1542.47 309.47,1542.47 549.47,1542.47 869.47,1542.47 949.47,1542.47 1029.47,1542.47 1109.47,1542.47 1909.47,1542.47 2069.47,1542.47 2309.47,1542.47 -50.53,1622.47 29.47,1622.47 109.47,1622.47 189.47,1622.47 269.47,1622.47 349.47,1622.47 429.47,1622.47 829.47,1622.47 1069.47,1622.47 1949.47,1622.47 2029.47,1622.47 2109.47,1622.47 2189.47,1622.47 2269.47,1622.47 -90.53,1702.47 -10.53,1702.47 69.47,1702.47 149.47,1702.47 229.47,1702.47 309.47,1702.47 389.47,1702.47 469.47,1702.47 709.47,1702.47 869.47,1702.47 1029.47,1702.47 1429.47,1702.47 1749.47,1702.47 1909.47,1702.47 1989.47,1702.47 2069.47,1702.47 2149.47,1702.47 2229.47,1702.47 -50.53,1782.47 29.47,1782.47 109.47,1782.47 189.47,1782.47 269.47,1782.47 349.47,1782.47 429.47,1782.47 509.47,1782.47 749.47,1782.47 1709.47,1782.47 1789.47,1782.47 1869.47,1782.47 1949.47,1782.47 2029.47,1782.47 2109.47,1782.47 2189.47,1782.47 -10.53,1862.47 69.47,1862.47 149.47,1862.47 229.47,1862.47 309.47,1862.47 389.47,1862.47 469.47,1862.47 549.47,1862.47 1189.47,1862.47 1589.47,1862.47 1669.47,1862.47 1909.47,1862.47 1989.47,1862.47 2069.47,1862.47 2149.47,1862.47 29.47,1942.47 109.47,1942.47 189.47,1942.47 269.47,1942.47 349.47,1942.47 429.47,1942.47 509.47,1942.47 589.47,1942.47 669.47,1942.47 1149.47,1942.47 1869.47,1942.47 1949.47,1942.47 2029.47,1942.47 2109.47,1942.47 69.47,2022.47 149.47,2022.47 229.47,2022.47 309.47,2022.47 389.47,2022.47 469.47,2022.47 549.47,2022.47 629.47,2022.47 709.47,2022.47 1109.47,2022.47 1189.47,2022.47 1429.47,2022.47 1509.47,2022.47 1589.47,2022.47 1829.47,2022.47 1909.47,2022.47 1989.47,2022.47 2069.47,2022.47 189.47,2102.47 269.47,2102.47 349.47,2102.47 429.47,2102.47 509.47,2102.47 589.47,2102.47 669.47,2102.47 989.47,2102.47 1469.47,2102.47 1549.47,2102.47 1629.47,2102.47 1709.47,2102.47 1789.47,2102.47 1869.47,2102.47 1949.47,2102.47 2029.47,2102.47 229.47,2182.47 309.47,2182.47 389.47,2182.47 469.47,2182.47 549.47,2182.47 629.47,2182.47 709.47,2182.47 1029.47,2182.47 1109.47,2182.47 1189.47,2182.47 1269.47,2182.47 1429.47,2182.47 1509.47,2182.47 1589.47,2182.47 1669.47,2182.47 1749.47,2182.47 1829.47,2182.47 1909.47,2182.47 349.47,2262.47 429.47,2262.47 509.47,2262.47 589.47,2262.47 669.47,2262.47 749.47,2262.47 909.47,2262.47 989.47,2262.47 1069.47,2262.47 1149.47,2262.47 1229.47,2262.47 1309.47,2262.47 1389.47,2262.47 1469.47,2262.47 1549.47,2262.47 1629.47,2262.47 1709.47,2262.47 1789.47,2262.47 469.47,2342.47 549.47,2342.47 629.47,2342.47 709.47,2342.47 789.47,2342.47 869.47,2342.47 949.47,2342.47 1429.47,2342.47 1509.47,2342.47 1589.47,2342.47 1669.47,2342.47 1749.47,2342.47 589.47,2422.47 669.47,2422.47 749.47,2422.47 829.47,2422.47 909.47,2422.47 1229.47,2422.47 1389.47,2422.47 1469.47,2422.47 1549.47,2422.47 789.47,2502.47 869.47,2502.47 949.47,2502.47 1269.47,2502.47 1349.47,2502.47
  other v2: 941.47,362 1308,442 1334,567 1859,583 1010,660 1010,906 1155,926.47 838,931 1769.47,1025 932,1048 2174,1070 1954,1075 1095,1128 1229,1128 952,1130 1855,1187 1809.47,1229 1657,1246.47 1914.94,1247 1584,1328 1654.53,1329.47 2055,1367 962.04,1387.83 1579,1397 1028.04,1403.83 861.04,1415.83 1659.47,1415.53 1736,1477 1072,1490.47 921.47,1495 1685.47,1567 1369.47,1596 1517.47,1732 1366,1874.47 1473,1898.47 847.04,1952.83 1441.47,1961
I2S1/PDM_IN3_AEC: J3.17 J4.12 R2.1 | length 1210.5
  Top Layer w8: J4.12 v2(510.04,1391.83) ; v2(1210.04,1188.83) 1220.14,1198.93 J3.17 1536.44,1198.93 R2.1
  Bottom Layer w8: v2(510.04,1391.83) 566.04,1335.83 715.16,1335.83 756.18,1294.81 1104.05,1294.81 v2(1210.04,1188.83)
I2S1/PDM_SCLK: J3.23 | length 1013.1
  Top Layer w10: 508.74,1163.69 v2(597.04,1109.83) ; v2(989.04,1206.83) 994.04,1206.83 1033.04,1245.83 1083.04,1245.83 1154.25,1317.04 J3.23
  Bottom Layer w10: v2(597.04,1109.83) 660.04,1172.83 661.15,1172.83 674.04,1185.72 674.04,1186.83 694.04,1206.83 v2(989.04,1206.83)
I2S1_LRCLK: J3.22 | length 941.6
  Top Layer w10: 558.74,1250.29 v2(652.04,1194.83) ; v2(1027.04,1202.83) 1053.04,1228.83 1096.04,1228.83 1164.57,1297.36 J3.22
  Bottom Layer w10: v2(652.04,1194.83) 687.04,1229.83 1000.04,1229.83 v2(1027.04,1202.83)
I2S1_MCLK: J3.25 | length 1114.4
  Top Layer w10: 458.74,1077.09 v2(543.04,1024.83) ; v2(935.04,1182.83) 935.04,1183.94 1014.93,1263.83 1075.15,1263.83 1167.73,1356.41 J3.25
  Bottom Layer w10: v2(543.04,1024.83) 543.15,1024.83 701.15,1182.83 v2(935.04,1182.83)
I2S1_SDO: J3.21 J4.11 R2.2 | length 1109.2
  Top Layer w8: J4.11 v2(694.04,1284.83) ; v2(1068.04,1203.83) 1101.04,1203.83 1174.88,1277.67 J3.21 1550.2,1277.67 1574.54,1253.33 R2.2
  Bottom Layer w8: v2(694.04,1284.83) 729.05,1249.81 1022.05,1249.81 v2(1068.04,1203.83)
IR_RX: J3.29
"MUTE_  MIC": J3.13 J4.25 | length 1089.5
  Top Layer w8: J4.25 v2(1036.04,1896.83) ; v2(1304.4,1129.83) 1314.04,1120.19 J3.13
  Bottom Layer w8: v2(1036.04,1896.83) 1283.04,1649.83 1283.04,1476.83 1306.04,1453.83 1306.04,1131.47 v2(1304.4,1129.83)
MUTE_MIC: R4.1 S1.2 | length 1430.9
  Top Layer w10: v2(339.04,690.94) 339.04,727.83 870.04,1258.83 870.04,1293.83 R4.1 ; S1.2 602.41,314.94 v2(611.6,330.1)
  Bottom Layer w10: v2(339.04,690.94) 339.04,641.83 611.6,369.27 611.6,369.4 605.6,375.4 ; v2(611.6,330.1) 612.04,330.54 612.04,368.83
NetC1_1: C1.1 J1.1 R1.1 | length 176.4
  Top Layer w20: R1.1 C1.1@1250,2108.15 ; C1.1 1251.61,2111 J1.1 J1.1@1329.19,2191.19
NetC5_1: C5.1 Y1.3 | length 184.8
  Top Layer w10: Y1.3 1234,495 1301,534 C5.1
NetC5_2: C5.2 R11.2@1398.5,512.45 U2.6 | length 167.6
  Top Layer w10: R11.2@1398.5,512.45 C5.2 1403,557 1410.53,589.06 U2.6
NetC6_1: C6.1 Y1.1 | length 77.1
  Top Layer w10: Y1.1 C6.1
NetC6_2: C6.2 R11.1@1417.5,479.55 U2.7 | length 247.9
  Top Layer w10: R11.1@1417.5,479.55 C6.2 1455,459 1467,488 1433,550 1436,573 U2.7
NetC7_1: C7.1 C8.1 L1.2 U2.1 U2.5 U2.10 | length 770.3
  Top Layer w10: C7.1 1223,726 C8.1 1222,690 L1.2 1316,689 1367,711 U2.1 1460,764 1520.07,748.19 1553.61,699.1 ; U2.5 1553.61,699.1 ; U2.10 1588,572 1597.27,636 1594,640 1553.61,699.1
NetC9_1: C9.1 J10.1 R13.1 | length 152.5
  Top Layer w20: R13.1 1760,1634 C9.1 1814,1691 J10.1
NetC12_1: C12.1 R19.1 R20.2 U2.13 | length 242.7
  Top Layer w12: R19.1 R20.2 C12.1 1463,414 1506.01,437.11 U2.13
NetD1_1: D1.1 R5.1 | length 55.8
  Top Layer w10: D1.1 1182.04,646.83 R5.1@1184.04,648.83
NetD2_1: D2.1 R6.1 | length 54
  Top Layer w10: D2.1 R6.1
NetD3_1: D3.1 J2.A7 R9.2 | length 1470.2
  Top Layer w8: R9.2 1121.04,410.83 1134.54,397.33 1149.33,397.33 v2(1159,407) ; v2(1840,1045) 1852.5,1057.5 1852.5,1068.5 D3.1 1852.5,1129.5 1852.5,1146.5 1875.77,1169.77 J2.A7
  Bottom Layer w8: v2(1159,407) 1168.31,397.69 1338.06,397.69 1854,913.63 1854,1031 v2(1840,1045)
NetD4_1: D4.1 J2.A6 R8.2 | length 1468.3
  Top Layer w8: R8.2 1121.04,367.83 1134.54,381.33 1151.67,381.33 v2(1159,374) ; v2(1884,1045) 1868.5,1060.5 1868.5,1069.5 D4.1 1868.5,1130.5 1868.5,1139.87 1878.71,1150.08 J2.A6
  Bottom Layer w8: v2(1159,374) 1166.69,381.69 1344.69,381.69 1870,907 1870,1031 v2(1884,1045)
NetD5_2: D5.2 R17.1 | length 65.6
  Top Layer w8: R17.1 D5.2
NetR8_1: R8.1 U1.15 | length 125
  Top Layer w8: U1.15 1003.41,403.06 1005.05,404.7 1016.04,404.7 1039.41,381.33 1055.54,381.33 R8.1
NetR9_1: R9.1 U1.16 | length 127.6
  Top Layer w8: U1.16 1003.41,428.65 1010.23,421.83 1021.54,421.83 1046.04,397.33 1055.54,397.33 R9.1
NetR14_1: R14.1 U2.4 | length 109.7
  Top Layer w10: R14.1 U2.4
NetR15_2: R15.2 U2.21 | length 201.8
  Top Layer w8: U2.21 1830,772 1824,881 R15.2
NetR16_2: R16.2 R17.2 U2.18 | length 236
  Top Layer w8: U2.18 1881,713 R17.2 R16.2
NetR18_2: R18.2 U2.17 | length 200.6
  Top Layer w12: U2.17 1870,676 1889,674.54 1930,610 1929,599 R18.2
POWER_KEY: J4.30 S4.2 | length 3606.8
  Top Layer w10: v2(384.59,672.39) 1190.04,1477.83 v2(1334.04,1477.83) ; J4.30 955.3,2175.27 v2@956.04,2174.83 ; v2@1548.68,277.46 S4.2
  Bottom Layer w10: v2(384.59,672.39) 779.15,277.83 v2(1550.04,277.83) ; v2(955.04,2174.83) 955.04,2043.87 1334.04,1664.87 v2(1334.04,1477.83)
RECOVER: J3.12 S5.2 | length 2731.6
  Top Layer w10: v2(478,668) 478,678.79 899.72,1100.51 J3.12 ; v2@1800.04,477.83 S5.2
  Bottom Layer w10: v2(478,668) 824,322 1643.21,322 v2(1799.04,477.83)
RESET: J3.11 S6.2 | length 1400.6
  Top Layer w10: S6.2 325.25,484.62 325.73,484.62 921.94,1080.83 1126.04,1080.83 J3.11
RXD: R7.2 U1.5 | length 339.7
  Top Layer w8: U1.5 708.13,633.37 751.31,676.55 778.63,676.55 798,695.93 798,819 808,829 819,829 832,816 R7.2
SARADC_IN1: J3.30 J4.15 | length 727.3
  Top Layer w10: J4.15 v2(797.04,1455.83) ; v2(1244.04,1454.83) J3.30
  Bottom Layer w10: v2(797.04,1455.83) 798.04,1454.83 v2(1244.04,1454.83)
SPI_CLK_M2: J3.33 J4.24 | length 894.5
  Top Layer w10: J4.24 v2(805.04,1914.83) ; v2(1237.04,1555.83) 1335.23,1555.83 1377.17,1513.89 J3.33
  Bottom Layer w10: v2(805.04,1914.83) 918.15,1914.83 1237.04,1595.94 v2(1237.04,1555.83)
SPI_CSN0_M2: J3.34 J4.22 | length 880.8
  Top Layer w10: J4.22 757.04,1827.83 776.04,1827.83 795.04,1846.83 827.04,1846.83 877.39,1817.43 943.04,1769.83 986.04,1740.83 1174.28,1740.83 1381.53,1533.58 J3.34
SPI_RX_M2: J3.32 J4.26 | length 909.3
  Top Layer w10: J4.26 v2(859.04,1999.83) ; v2(1260.04,1533.83) 1333.19,1533.83 1372.81,1494.21 J3.32
  Bottom Layer w10: v2(859.04,1999.83) 870.33,1999.83 1260.04,1610.12 v2(1260.04,1533.83)
SPI_TX_M2: J3.31 J4.28 | length 962.8
  Top Layer w10: J4.28 v2(904.04,2088.83) ; v2(1312.04,1503.83) 1339.15,1503.83 1368.46,1474.52 J3.31
  Bottom Layer w10: v2(904.04,2088.83) 904.04,2070.83 1312.04,1662.83 v2(1312.04,1503.83)
SPK_EN: J4.13 R3.1 R4.2 | length 239.3
  Top Layer w8: J4.13@610.74,1458.1 617.38,1454.22 622.47,1451.24 J4.13@632.58,1445.33
  Top Layer w20: J4.13 R4.2 R3.1
TXD: R10.2 U1.1 | length 339.7
  Top Layer w8: U1.1 708.13,735.73 751.31,692.55 772,692.55 782,702.55 782,825.63 801.37,845 819,845 832,858 R10.2
UART_RX_AO_A: J3.28 J4.14 | length 1066.4
  Top Layer w8: J4.14 v2(549.04,1484.83)
  Top Layer w10: v2(1064.04,1319.83) 1061.93,1319.83 1157.56,1415.47 J3.28
  Bottom Layer w8: v2(549.04,1484.83) 683.04,1350.83 721.38,1350.83 752.38,1319.83 v2(1064.04,1319.83)
UART_RX_AO_B: J3.10 R10.1 | length 724.1
  Top Layer w8: R10.1 898,858 911,845 934,845 951,862 951,1020.63 991.51,1061.14 J3.10
UART_TX_AO_A: J3.27 J4.16 | length 1020.1
  Top Layer w10: J4.16 v2(604.04,1568.83) ; v2(1124.04,1344.83) 1124.04,1343.83 1175.99,1395.78 J3.27
  Bottom Layer w10: v2(604.04,1568.83) 828.04,1344.83 v2(1124.04,1344.83)
UART_TX_AO_B: J3.9 R7.1 | length 722.6
  Top Layer w8: R7.1 898,816 911,829 940.63,829 967,855.37 967,1014 994.45,1041.45 J3.9
USB20_DM_B: J3.4 R21.1 | length 140.1
  Top Layer w8: J3.4 1440,943.03 1441.84,941.18 1470.06,941.18 1489.37,960.5 1518.5,960.5 1532,974 R21.1
USB20_DP_B: J3.3 R22.1 | length 140.1
  Top Layer w8: J3.3 1440,923.34 1441.66,925 1476.5,925 1496,944.5 1518.5,944.5 1532,931 R22.1
USB20_HOST_DM: J3.7 R31.1 U2.25 | length 2149.4
  Top Layer w8: R31.1 1288.67,1967.14 1288.67,1945.48 1274.41,1931.22 1274.41,1898.97 1342.37,1831 1516.37,1831 1645,1702.37 1645,1515.74 1612,1482.74 1612,1156.24 1456,1000.24 1441.84,1000.24 1440,1002.08 J3.7 1400.5,1002.08 1398.66,1000.24 1315.61,1000.24 1257,941.63 1257,823.37 1292.37,788 1656.78,788 1663.89,795.11 1668,796 U2.25
USB20_HOST_DP: J3.6 R32.1 U2.26 | length 2103.5
  Top Layer w8: R32.1 1322.14,1934.67 1300.48,1934.67 1290.41,1924.59 1290.41,1905.59 1349,1847 1523,1847 1661,1709 1661,1510.53 1628,1477.53 1628,1149.61 1462.63,984.24 1441.84,984.24 1440,982.4 J3.6 1400.5,982.4 1398.66,984.24 1322.24,984.24 1273,935 1273,830 1299,804 1647.42,804 1652.16,808.74 1654,817 U2.26
VBUS_UART: C3.1 C4.1 J2.A4 J2.A9 J2.B4 J2.B9 R11.1@1608.04,1620 R12.2 U1.20 | length 2603.6
  Top Layer w8: C3.1 1068.04,530.83 1068.22,531.01 C4.1 ; v2(1979,1213) 1982.86,1209.14 J2.A9 2089.15,1209.14 2099,1199.29 J2.B9 2151.71,1199.29 2163.04,1187.96 2163.04,1113.04 2150.87,1100.87 J2.B4 2101.13,1100.87 2091.29,1110.71 J2.A4
  Top Layer w10: U1.20 C4.1@1068.22,531.01 ; C4.1 1069.04,553.96 1076,560.92 1257.92,560.92 1275,578 v3(1275,614.47)
  Top Layer w20: R11.1@1608.04,1620 R12.2 1609,1560.87 v2(1609,1533)
  Bottom Layer w10: v3(1275,614.47) 1275,770 1309,804 1589,804 1818,1033 1818,1055.11 1819,1056.11 1819,1182.53 1849.47,1213 v2(1979,1213)
  Bottom Layer w20: v2(1609,1533) 1800.47,1533 1979,1354.47 v2(1979,1213)
VOL+: J3.15 J4.21 S2.2 | length 2883.4
  Top Layer w10: v2(382.04,630.83) 383.04,630.83 910.04,1157.83 v2(1273.04,1157.83) 1418.52,1157.83 J3.15 ; J4.21 v2@1198.01,1579.55 ; S2.2 v2(917.04,248.83)
  Bottom Layer w10: v2(382.04,630.83) 388.04,630.83 770.04,248.83 v2(917.04,248.83) ; v2(1202.04,1577.83) 1202.04,1529.72 1273.04,1458.72 v2(1273.04,1157.83)
VOL-: J4.23 S3.2 | length 2765.7
  Top Layer w10: v2(389.04,709.83) 1175.04,1495.83 v2(1175.04,1499.83) ; J4.23 v2(994.04,1807.83) ; v2(1230.04,299.83) 1230.04,299.75 1230.08,299.79 1230.08,232.83 S3.2
  Bottom Layer w10: v2(389.04,709.83) 389.15,709.83 799.15,299.83 v2(1230.04,299.83) ; v2(994.04,1807.83) 1175.04,1626.83 v2(1175.04,1499.83)
pads on no net: J2.31 J2.32 J2.A2 J2.A3 J2.A5 J2.A8 J2.A10 J2.A11 J2.B2 J2.B3 J2.B5 J2.B6 J2.B7 J2.B8 J2.B10 J2.B11 J3.8 J3.14 J3.16 J4.01 J4.02 J4.03 J4.04 J4.05 J4.06 J4.07 J4.08 J4.09 S1.6 S2.6 S3.6 S4.6 S5.6 S6.6 U1.2 U1.3 U1.6 U1.8 U1.9 U1.10 U1.11 U1.12 U1.13 U1.14 U1.24 U1.27 U1.28 U2.2 U2.3 U2.8 U2.9 U2.14 U2.19 U2.20 U2.22 U2.23
copper on no net:
  other v2: 901.47,1698

## Polygon pours and split planes (outlines as drawn)
no net on Keep-Out Layer "AutoNaming" (none, remove dead copper): -196.26,1279.66 ccw(c1083.16,1279.66) 1083.16,0.25 ccw(c1083.16,1279.66) 2362.57,1279.66 ccw(c1083.16,1279.66) 1083.16,2559.08 ccw(c1083.16,1279.66)
GND on Bottom Layer "AutoNaming" (hatched 90Degree grid 4 track 5, remove dead copper, pour order 0): -263,2622 -220,2579 2448,2579 2448,-238 2459,-249 2456,-246 -231,-246 -231,2587 -264,2620
GND on Top Layer "AutoNaming" (hatched 90Degree grid 4 track 5, remove dead copper, pour order 2): -262,2597 2476,2597 2480,2593 2488,2585 2488,-189 -238,-189 -262,-165 -262,2593

## Keep-outs
Keep-Out Layer:
  circle w0.5: c1083.16,1279.66 r1279.42
  circle w0: c3722.2,3918.3 r1279.42
  circle w0.5: c3721.88,1279.64 r1279.42
  circle w0.5: c1083.14,3918.42 r1279.42
  lines w0.5: -176.85,3359.97 ccw(c1083.23,3918.36) 661.51,2606.2 661.5,2591.81 ccw(c1083.22,1279.63) -155.11,1884.79 -176.85,1834.88 -176.85,3359.96 ; -99.8,4625.71 -176.85,4625.71 -176.85,5394.79 cw(c-118.11,5394.79) -118.11,5453.53 4923.19,5453.53 cw(c4923.19,5394.79) 4981.93,5394.79 4981.93,4625.71 4905,4625.71 4904.49,4626.56 ccw(c3722.18,3918.29) 4642.11,4944.56 4641.52,4945.08 4641.52,5211.59 4198.76,5211.59 ccw(c3721.94,3918.43) 2410.14,4341.27 ; -99.74,572.4 -176.85,572.4 -176.85,-196.69 ccw(c-118.11,-196.69) -118.11,-255.43 4923.19,-255.43 ccw(c4923.19,-196.69) 4981.93,-196.69 4981.93,572.4 4905.4,572.4 4904.89,571.54 cw(c3722.15,1279.38) 2410.09,856.97 2409.7,858.19 2395.37,858.19 2394.98,856.98 cw(c1083.17,1279.7) -99.23,571.54 ; -99.29,4626.56 cw(c1083.16,3918.45) 163.22,4944.76 ; 163.81,4945.28 163.81,5211.59 606.32,5211.59 cw(c1083.13,3918.43) 2394.93,4341.27 ; 963.43,5172.25 cw(c963.73,5168.76) 963.47,5172.25 ; 1202.84,5172.25 ccw(c1202.51,5168.76) 1202.8,5172.25 ; 1503.98,2606.03 ccw(c1083.13,3918.46) 2395.47,3497.32 ; 1504,2606.01 1504,2592.07 cw(c1083.13,1279.64) 2395.43,1700.95 ; 1968.99,5294.5 1969.02,5294.5 ; 2395.43,1700.98 2405.24,1700.98 ; 2409.6,3497.32 ccw(c3721.99,3918.38) 3300.27,2606.2 ; 3300.24,2606.21 3300.23,2591.83 ccw(c3721.95,1279.64) 2409.64,1700.98 ; 2405.24,1700.98 2409.64,1700.98 ; 2405.24,1700.98 2409.64,1700.98 ; 2006.6,5294.5 2006.62,5294.5 ; 4142.74,2592.08 cw(c3721.87,1279.65) 4981.93,1838.11 4981.93,3359.98 cw(c3721.89,3918.44) 4142.74,2606.02 4142.74,2592.08
  lines w0.51: 26.85,4799.23 cw(c21.83,4724.47) 96,4735.01 ; 117,4904.99 ccw(c191.17,4915.53) 186.15,4840.77 ; 187.7,2873.38 ccw(c218.9,2908.79) 251.91,2942.53 ; 224.75,204.43 ccw(c210.36,282.18) 288.97,273.58 ; 265.67,2388.65 cw(c213.44,2296.7) 318.68,2307.06 ; 302.53,2786.98 cw(c332.47,2823.47) 360.47,2861.47 ; 340.03,118.42 cw(c418.64,109.82) 404.25,187.57 ; 380.32,2461.94 ccw(c468.9,2461.84) 430.5,2382.01 ; 1740.04,180.21 cw(c1721.18,110.6) 1792.22,98.12 ; 1814.53,4973.53 ccw(c1798.81,5045.53) 1872.47,5048.02 ; 1814.7,2331.38 ccw(c1783.7,2424.55) 1878.91,2400.53 ; 1855.32,253.94 ccw(c1937.74,249.97) 1905.5,174.01 ; 1869.18,2912.86 cw(c1817.38,2814.47) 1926.14,2837.62 ; 1926.53,4886.98 cw(c2000.19,4889.47) 1984.47,4961.47 ; 1929.53,2244.98 cw(c1998.19,2251.36) 1987.47,2319.48 ; 1982.35,3001.42 ccw(c2042.41,2983.42) 2032.53,2921.5 ; 2821.27,2322.58 cw(c2783.28,2234.65) 2878.22,2247.34 ; 2835.5,4968.36 cw(c2817.49,4895.56) 2892.46,4893.12 ; 2841.7,2858.38 ccw(c2821.76,2941.28) 2905.91,2927.53 ; 2849.47,214.47 ccw(c2827.75,291.15) 2907.41,288.97 ; 2934.43,2411.14 ccw(c2987.31,2388.63) 2984.62,2331.22 ; 2948.43,5058.14 ccw(c3008.55,5040.17) 2998.62,4978.22 ; 2956.53,2771.98 cw(c3025.64,2778.01) 3014.47,2846.47 ; 2958.03,133.42 cw(c3031.51,129.58) 3022.25,202.57 ; 4415.02,206.65 cw(c4391.4,141.53) 4458.04,122.65 ; 4454.47,2327.47 ccw(c4423.12,2411.64) 4512.41,2401.97 ; 4528.32,280.94 ccw(c4597.97,268.95) 4578.5,201.01 ; 4554.45,2944.55 cw(c4560.37,2886.29) 4617.74,2874.56 ; 4563.03,2246.42 cw(c4638.93,2240.34) 4627.24,2315.57 ; 4628.55,4828.2 ccw(c4625.72,4901.69) 4698.55,4891.5 ; 4649,3039.48 ccw(c4702.92,3025.35) 4712.55,2970.45 ; 4721.39,4729.52 cw(c4797.06,4707.73) 4796.64,4786.48

## Other copper
Top Layer:
  rectangle net 5V: 1404,1547 1473,1618
  rectangle net 3V3: 1380,1627 1436,1662
  rectangle net GND: 2051,1037 2105,1047
  pour cut-out: 1174,406 1163,395 1162,395 1162,359.08 1165.47,355.61 1189.87,380 1190,380 1190,382 1181.53,390.47 1176.58,390.47 1176.58,403.42
  pour cut-out: 1138,514 1130,514 1120,504 1127,497 1144.86,497 1149.09,501.24 1138,512.33
  pour cut-out: 1130,496 1138,504 1138,514 1145,514 1153,522 1177,522 1178,523 1181,523 1181,522 1179,520 1180,519 1180,513 1173.47,506.47 1168.19,506.47
  pour cut-out: 982,649 984.17,646.83 1069.04,646.83 1069.04,654.9 1085.47,671.33 1132.35,671.33 1141.47,680.46 1141.93,680 1202,680 1202,651 1214,639 1208,633 1208,584 1124,584 1109.47,569.47 1109.47,526.47 1084,501 1022,501 982,541
  pour cut-out: 1142.04,1402.83 1391.99,1402.83 1403.04,1391.78 1403.04,1323.83 1153.04,1323.83 1143.04,1333.83 1143.04,1403.83
  pour cut-out: 834.04,1875.83 804.04,1845.83 804.04,1844.83 853.04,1844.83 934.04,1763.83 934.04,1742.83 929.04,1737.83 959.04,1707.83 983.04,1707.83 983.04,1737.83 995.04,1749.83 995.04,1806.83 976.04,1825.83 911.04,1825.83 861.04,1875.83
  pour cut-out: 339.04,664.96 372,632 405,665 411,665 411,721 600,910 600,926 571,955 339.04,723.04
  pour cut-out: 1887,748 1852,713 1852,676 1902.39,676 1904.86,678.47 1895.2,688.14 1895.2,742.47
  pour cut-out: 1776,516 1788,528 1861,528 1861,512.37 1871,502.37 1871,465 1870,465 1834,429 1778,485 1778,514
  pour cut-out: 961,1288 980,1288 925,1233 887,1271 887,1362
  pour cut-out: 1369,794 1369,750 1392,727 1405,740 1446,740 1470,764 1443,791 1373,791 1370,794
  pour cut-out: 1422,437 1466,393 1485,393 1485,427 1517,459 1515,461 1515,523 1452,586 1425,559 1425,460 1438,447 1430,439 1425,439
Bottom Layer:
  pour cut-out: 1055.04,1818.83 1055.04,1815.12 1260.04,1610.12 1261.75,1611.83 1292.04,1611.83 1292.04,1656.83 1107.04,1841.83 1107.04,1854.83 1094.24,1854.83 1065.04,1825.62
  pour cut-out: 1257.04,1502.83 1314.04,1502.83 1320.04,1508.83 1333.04,1495.83 1333.04,1458.35 1310.56,1458.35 1303.04,1450.83 1303.04,1131.19 1304.4,1129.83 1299.4,1124.83 1282.95,1124.83 1269.04,1138.74 1279.04,1148.74 1279.04,1452.72 1258.04,1473.72 1258.04,1501.83
  pour cut-out: 1391,305 1426,340 1426,358 1068,358 1050,340 1080,310 1080,308 1378,308 1381,305
  pour cut-out: 594.04,312.83 594.04,366.83 600.04,372.83 644.04,328.83 644.04,325.32 622.07,325.32 605.57,308.83 597.04,308.83 593.04,312.83
  pour cut-out: 337.04,699.83 367.04,699.83 382.04,714.83 386.71,710.15 386.71,657.5 387.04,657.83 395.04,649.83 395.04,645.83 388.04,645.83 379.83,637.62 358.83,637.62 354.04,632.83 341.04,645.83 341.04,699.83 340.04,700.83
  pour cut-out: 903.04,2098.83 903.04,2104.83 955.04,2156.83 958.04,2153.83 958.04,2026.83 953.04,2021.83 904.04,2070.83 904.04,2088.83
  pour cut-out: 892.04,1974.83 842.04,1924.83 842.04,1914.83 944.04,1914.83 896.04,1962.83 896.04,1974.12
  pour cut-out: 1179.04,1517.83 1137.04,1475.83 1137.04,1440.33
  pour cut-out: 687.04,1229.83 687.04,1301.83 692.04,1306.83
  pour cut-out: 670.04,1215.83 670.04,1293.83 690.04,1313.83 753.04,1250.83 753.04,1249.81 737.02,1249.81 694.04,1206.83 682.04,1218.83 672.04,1218.83
  pour cut-out: 777.04,920.83 819.04,962.83 819.04,976.83 727.04,976.83 724.04,973.83 785.04,912.83 785.04,910.83
  pour cut-out: 566.04,1335.83 687.04,1456.83 725.04,1456.83 845.04,1336.83 769.04,1260.83 769.04,1254.83 647.04,1254.83
  pour cut-out: 689.04,1443.83 689.04,1476.83 690.04,1477.83 706.04,1461.83 706.04,1456.83 703.04,1456.83 690.04,1443.83
  pour cut-out: 494.04,1320.83 494.04,1324.92 545.04,1375.92 568.04,1352.92 568.04,1320.83 489.04,1320.83 487.04,1318.83
  pour cut-out: 361.04,968.25 376.55,968.25 461.13,1052.83 506.04,1007.92 506.04,984.83 494.04,984.83 477.04,967.83 472.04,972.83 356.46,972.83
  pour cut-out: 994.04,1702.83 1019.04,1727.83 1066.04,1727.83 1014.04,1779.83 983.04,1748.83 970.04,1748.83 995.04,1723.83 995.04,1697.83
  pour cut-out: 1012,394 1012,299 1024,287 1552.72,287 1585.72,320 1406.37,320 1344.69,381.69 1166.69,381.69 1166.69,368.69 1142,344 1071,344 1022,393
  pour cut-out: 606,401 606,335.69 613.69,328 680,328 607,401
  pour cut-out: 299,1058 299,1081 356,1138 455,1039 455,1012 446,1012 412,978 367,978 298,1047 298,1058
  pour cut-out: 859.04,1999.83 904.04,2044.83 904.04,2079.83 907.17,2079.83 1113,1874 1113,1817 1064,1768 936,1896 936,1933 925.87,1933
  pour cut-out: 1134,1347 1134,1271 1127,1264 1098,1293 1057,1293 1057,1327 1076,1346 1133,1346
  pour cut-out: 517.47,1409.86 549.44,1441.83 549.44,1465.33 561.67,1465.33 633,1394 633,1373.83 593.17,1334 557,1334 514,1377 515.75,1378.75 515.75,1410.47

## Silkscreen, mask and mechanical layers (free items; w line width, h text height)
Top Overlay:
  lines w7.87: 1130,689 1148,689 ; 1139,679 1139,701 ; 1157,556 1172,556 ; 1165,547 1165,564 ; 2045.5,881.5 2063.5,863.5 ; 2049,866 2061.5,878.5
  text "AIWAC_DEBUG-V1.0_20180822" at -76,1529 h30 r60
Mechanical 2:
  lines w0.5: -6050.28,-3977.28 10091.45,-3977.28
Mechanical 4:
  lines w0.5: 56.3,550.37 cw(c59.16,552.38) 56.27,550.4
Mechanical 5:
  lines w0.5: -60.19,751.29 ccw(c-57.01,752.76) -59.94,750.85 ; 55.95,550.85 ccw(c59.08,552.42) 56.23,550.39
Mechanical 6:
  lines w0.5: -60.18,751.35 ccw(c-57,752.81) -60.12,751.24 ; 56.2,550.51 ccw(c59.14,552.4) 56.29,550.37
Mechanical 7:
  lines w0.5: 13.94,614.01 ccw(c16.95,615.81) 13.98,613.95
Mechanical 8:
  lines w0.5: 84.76,511.87 85.62,510.75
Mechanical 9:
  lines w0.5: 56.3,550.37 cw(c59.15,552.39) 56.27,550.41
Mechanical 11:
  circle w0.5: c108.15,714.66 r126
  circle w0.5: c1083.15,2409.66 r126
  circle w0.5: c2063.15,714.66 r126
Mechanical 12:
  circle w0.5: c108.15,714.66 r126
  circle w0.5: c1083.15,2409.66 r126
  circle w0.5: c2063.15,714.66 r126
Mechanical 13:
  circle w0.5: c108.15,714.66 r126
  circle w0.5: c1083.15,2409.66 r126
  circle w0.5: c2063.15,714.66 r126
Mechanical 14:
  circle w0.5: c108.15,714.66 r126
  circle w0.5: c1083.15,2409.66 r126
  circle w0.5: c2063.15,714.66 r126
Mechanical 15:
  circle w0.5: c108.15,714.66 r126
  circle w0.5: c1083.15,2409.66 r126
  circle w0.5: c2063.15,714.66 r126
Mechanical 16:
  circle w0.5: c108.15,714.66 r126
  circle w0.5: c1083.15,2409.66 r126
  circle w0.5: c2063.15,714.66 r126

## Dimensions
4923.19,5453.53 to 4923.19,-255.43 on Top Layer
4981.93,4625.71 to -176.85,4625.71 on Top Layer